# Altium PCB PCB.PcbDoc (part 2 of 2)
Units mm, origin at the board's own origin, x right, y up, seen from the top; angles counter-clockwise.
Board outline 143.9 x 84.61 mm, 2 copper layers (Top Layer, Bottom Layer); 156 components, 117 nets, 550 pads, 1112 vias.
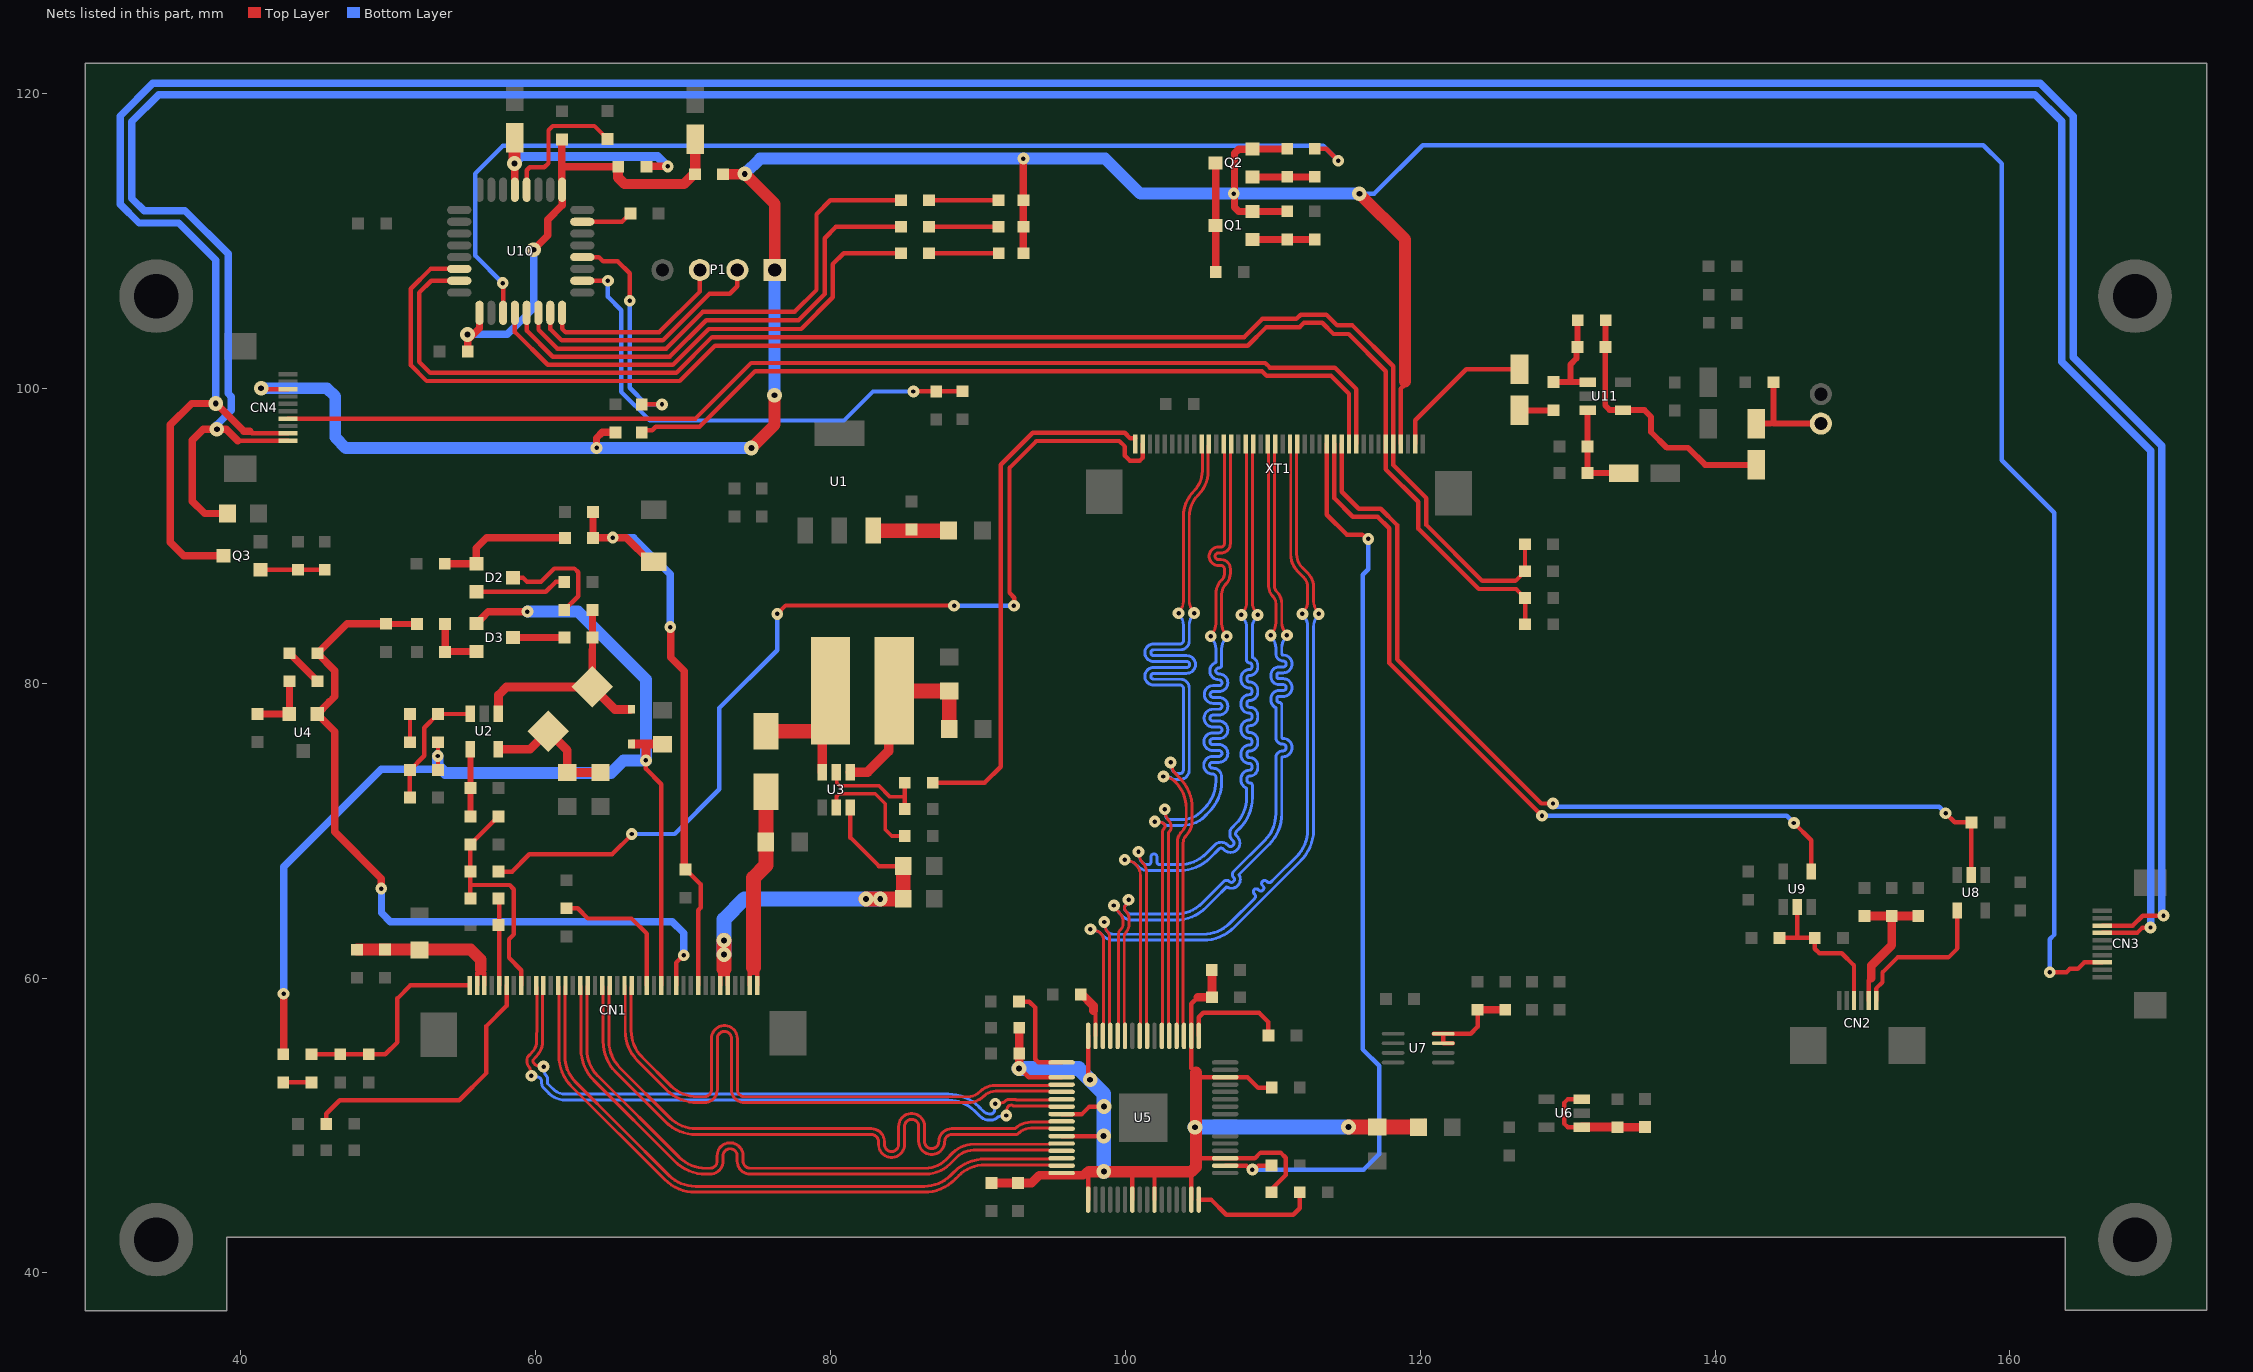
[diagram p2: the nets of this part, all layers, seen from the top]

## Via types
v1: diameter 0.8, hole 0.3, Top Layer to Bottom Layer, tented both sides, 1066 vias
v2: diameter 1, hole 0.4, Top Layer to Bottom Layer, tented both sides, 46 vias

## Nets (pads, with @x,y where several pads share a name; then routed paths per layer and width w, separated by ;. In a path a pad name is that pad's centre, name@x,y a point inside that pad or via, vN(x,y) a via of type N, cw(c..) or ccw(c..) an arc to the next point about the centre after c; other vN are vias at no path point) (continued)
LCD_AVDD: C10.1 C13.2 CN1.27 D1.2 D3.1 R7.2 R13.2 | length 81.5
  Top Layer w0.3: C10.1@53.375,74.105 R7.2@53.375,76 ; D3.1@55.975,84.05 56,84.05 56.3,84.35 D3.1@56.3,84.375 ; v1(67.48,74.76) 67.48,74.19 68.525,73.145 CN1.27@68.525,59.5 ; 67.48,75.822 67.533,75.875 ; C13.2@68.589,75.875 C13.2@68.604,75.86
  Top Layer w0.5: R13.2@42.875,54.83 42.9,54.855 v1(42.9,58.93) ; D3.1@56.3,84.375 56.785,84.86 v1(59.44,84.86)
  Top Layer w0.6: D1.2@66.58,75.875 67.533,75.875 C13.2@68.525,75.875 ; v1(67.48,74.76) 67.48,75.822
  Bottom Layer w0.5: v1(42.9,58.93) 42.9,67.54 49.52,74.16 53.61,74.16
  Bottom Layer w0.8: v1(53.36,75.06) 53.36,74.41 53.61,74.16 53.86,73.91 65.11,73.91 65.96,74.76 v1(67.48,74.76) 67.48,80.26 62.88,84.86 v1(59.44,84.86)
LCD_BKL_PWM0_30: R4.2 XT1.40 | length 35.7
  Top Layer w0.3: R4.2@86.94,73.25 90.45,73.25 91.54,74.34 91.54,94.81 93.72,96.99 99.95,96.99 100.32,96.62 XT1.40@100.67,96.62
LCD_EN_GPIO2_D4_30: R1.2 XT1.39 | length 68.3
  Top Layer w0.3: R1.2@57.475,67.225 58.405,67.225 59.57,68.39 65.18,68.39 v1@66.53,69.74 ; v1(76.38,84.7) 76.95,85.27 88.36,85.27 v1(88.38,85.25) ; v1@92.47,85.28 92.47,85.8 92.14,86.13 92.14,94.601 93.969,96.43 99.59,96.43 99.97,96.05 99.97,95.43 100.3,95.1 100.99,95.1 101.17,95.28 XT1.39@101.17,96.23
  Bottom Layer w0.3: v1(66.52,69.77) 69.43,69.77 72.46,72.8 72.46,78.32 76.38,82.24 v1(76.38,84.7) ; v1(88.38,85.25) v1(92.44,85.25) v1@92.47,85.28
LCD_RESET: C19.2 CN1.5 R3.1 | length 5.9
  Top Layer w0.3: R3.1@57.48,65.39 57.525,65.345 CN1.5@57.525,59.5
LCD_STBY: C18.2 CN1.8 R1.1 R2.2 R3.2 | length 16.4
  Top Layer w0.3: 55.57,66.31 R1.1@55.57,67.225 C18.2@55.57,69.065 57.22,70.715 57.225,70.715 R2.2@57.475,70.965 ; R3.2@55.575,65.39 55.57,65.395 55.57,66.28 55.6,66.31 58.24,66.31 58.52,66.03 58.52,62.96 58.19,62.63 58.19,61.37 59.025,60.535 CN1.8@59.025,59.5
LCD_VCOM: C15.2 CN1.1 R14.1 R15.2 | length 14.4
  Top Layer w0.3: R14.1@44.8,54.83 R15.2@46.75,54.83 48.67,54.83 C15.2@48.675,54.825 49.795,54.825 50.62,55.65 50.62,58.62 51.5,59.5 CN1.1@55.525,59.5
LCD_VDD: C20.2 C21.1 CN1.2 CN1.3 L6.2 | length 11.7
  Top Layer w0.3: CN1.2@56.025,59.5 56.025,60.345 56.28,60.6 56.525,60.355 CN1.3@56.525,59.5
  Top Layer w0.8: C20.2@47.875,61.93 47.97,61.93 C21.1@49.775,61.93 52.12,61.93 55.6,61.93 56.28,61.25 56.28,60.6
LCD_VGH: C17.2 CN1.29 R11.2 R17.2 U4.1 | length 52.8
  Top Layer w0.3: C17.2@49.84,84.03 C17.2@49.845,84.025 ; CN1.29@69.525,59.5 69.525,61.035 v1(70.04,61.55)
  Top Layer w0.4: C17.2@49.845,84.025 R11.2@51.95,84.025
  Top Layer w0.5: v1(49.53,66.07) 49.53,66.75 46.36,69.92 46.36,76.725 45.405,77.68 45.38,77.68 45.18,77.88 U4.1@45.18,77.905 46.005,78.73 46.01,78.73 46.38,79.1 46.38,80.855 R17.2@45.205,82.03 47.205,84.03 C17.2@49.84,84.03
  Bottom Layer w0.5: v1@49.54,66.07 49.54,64.43 50.14,63.83 69.27,63.83 70.04,63.06 v1(70.04,61.55)
LCD_VGL: C14.2 CN1.32 R10.2 R19.2 Z1.1 | length 40.3
  Top Layer w0.3: C14.2@70.22,67.41 70.34,67.29 70.34,67.21 71.2,66.35 71.2,64.78 71.025,64.605 CN1.32@71.025,59.5
  Top Layer w0.5: R19.2@63.885,91.62 R10.2@63.885,89.86 66.15,89.86 67.785,88.225 Z1.1@68.01,88.225 ; v1(69.13,83.81) 69.16,83.78 69.16,81.74 70.07,80.83 70.07,67.56 C14.2@70.22,67.41
  Bottom Layer w0.5: v1(65.23,89.88) 66.64,89.88 69.13,87.39 v1(69.13,83.81)
LED+: C16.2 CN1.39 CN1.40 D4.2 | length 14.9
  Top Layer w0.3: CN1.39@74.525,59.5 74.525,60.455 74.78,60.71 75.025,60.465 CN1.40@75.025,59.5
  Top Layer w1: 74.78,60.71 74.78,66.81 75.625,67.655 D4.2@75.625,72.64
LED-: CN1.35 CN1.36 R18.2 R20.2 U3.6 | length 29.2
  Top Layer w0.3: CN1.35@72.525,59.5 72.525,60.735 ; CN1.36@73.025,59.5 73.025,60.77 ; U3.6@81.35,71.565 81.35,69.53 83.285,67.595 R20.2@84.93,67.595
  Top Layer w1: 72.78,60.62 v2(72.78,61.59) v2(72.78,62.56) ; v2(82.4,65.37) v2(83.37,65.37) R18.2@84.93,65.37 R20.2@84.93,67.595
  Bottom Layer w1: v2(72.78,61.59) v2(72.78,62.56) 72.78,63.99 74.16,65.37 v2(82.4,65.37) v2(83.37,65.37)
LED_A: CN3.8 CN4.9 Q3.3 | length 240.6
  Top Layer w0.3: 40.61,97.08 40.74,96.95 CN4.9@43.2,96.95 ; CN3.8@166.26,63.56 168.34,63.56 169.01,64.23 170.41,64.23 v1(170.42,64.24)
  Top Layer w0.5: Q3.3@38.83,88.65 36.12,88.65 35.22,89.55 35.22,97.53 36.66,98.97 v2(38.3,98.97) 38.32,98.97 40.21,97.08 40.61,97.08
  Bottom Layer w0.5: v2@38.3,98.965 v2(38.3,98.97) 38.3,108.71 35.79,111.22 33.09,111.22 31.81,112.5 31.81,118.48 34.03,120.7 162.05,120.7 164.3,118.45 164.3,102.12 170.3,96.12 170.3,64.24 v1@170.3,64.23
LED_K: CN3.7 CN4.10 R49.2 | length 232.7
  Top Layer w0.3: 39.78,96.45 CN4.10@43.2,96.45 ; CN3.7@166.26,63.06 168.63,63.06 168.969,63.399 169.509,63.399 v1(169.54,63.43)
  Top Layer w0.5: R49.2@39.1,91.51 37.54,91.51 36.7,92.35 36.7,96.48 37.45,97.23 v2(38.37,97.23) 39,97.23 39.78,96.45
  Bottom Layer w0.5: v2@38.36,97.18 38.36,97.52 39.35,98.51 39.35,99.44 39.14,99.65 39.14,109.12 36.21,112.05 33.44,112.05 32.61,112.88 32.61,118.1 34.43,119.92 161.7,119.92 163.51,118.11 163.51,101.81 169.55,95.77 v1@169.55,63.48
LVDS_CH0_N: CN1.13 U5.47 | length 43.7
  Top Layer w0.2: CN1.13@61.525,59.5 cw(c61.404,59.379) 61.575,59.379 61.575,54.725 ccw(c64.511,54.725) 62.435,52.649 68.751,46.333 ccw(c70.823,48.406) 70.823,45.475 86.36,45.475 ccw(c86.36,48.407) 88.434,46.334 88.681,46.581 cw(c90.477,44.785) 90.477,47.325 94.813,47.325 cw(c94.813,47.24) 94.873,47.3 ccw(c94.933,47.36) 94.933,47.275 U5.47@95.675,47.275
LVDS_CH0_P: CN1.14 U5.46 | length 43.1
  Top Layer w0.2: CN1.14@62.025,59.5 ccw(c62.146,59.379) 61.975,59.379 61.975,54.727 ccw(c64.515,54.727) 62.719,52.931 65.718,49.932 ; 65.719,49.931 69.031,46.619 ccw(c70.827,48.415) 70.827,45.875 86.357,45.875 ccw(c86.357,48.415) 88.153,46.619 88.398,46.864 ; 88.4,46.866 cw(c90.474,44.792) 90.474,47.725 94.813,47.725 ccw(c94.813,47.81) 94.873,47.75 cw(c94.933,47.69) 94.933,47.775 U5.46@95.675,47.775
LVDS_CH1_N: CN1.16 U5.45 | length 43.7
  Top Layer w0.2: CN1.16@63.025,59.5 cw(c62.904,59.379) 63.075,59.379 63.075,55.15 ccw(c66.011,55.15) 63.935,53.074 69.449,47.56 ccw(c71.526,49.636) 71.526,46.7 71.826,46.7 ccw(c71.826,47.581) 72.707,47.581 72.707,47.943 cw(c73.188,47.943) 73.669,47.943 73.669,47.581 ccw(c74.55,47.581) 74.55,46.7 86.438,46.7 ccw(c86.438,49.06) 88.107,47.391 88.573,47.857 cw(c89.702,46.728) 89.702,48.325 94.813,48.325 cw(c94.813,48.24) 94.873,48.3 ccw(c94.933,48.36) 94.933,48.275 U5.45@95.675,48.275
LVDS_CH1_P: CN1.17 U5.44 | length 43.1
  Top Layer w0.2: CN1.17@63.525,59.5 ccw(c63.646,59.379) 63.475,59.379 63.475,55.152 ccw(c66.015,55.152) 64.219,53.356 69.731,47.844 ccw(c71.527,49.64) 71.527,47.1 71.826,47.1 ccw(c71.826,47.581) 72.307,47.581 72.307,47.943 cw(c73.188,47.943) 74.069,47.943 74.069,47.581 ccw(c74.55,47.581) 74.55,47.1 86.437,47.1 ccw(c86.437,49.063) 87.825,47.675 88.292,48.142 cw(c89.699,46.736) 89.699,48.725 94.813,48.725 ccw(c94.813,48.81) 94.873,48.75 cw(c94.933,48.69) 94.933,48.775 U5.44@95.675,48.775
LVDS_CH2_N: CN1.19 U5.42 | length 43.7
  Top Layer w0.2: CN1.19@64.525,59.5 cw(c64.404,59.379) 64.575,59.379 64.575,55.7 ccw(c67.511,55.7) 65.435,53.624 68.816,50.243 ccw(c70.893,52.319) 70.893,49.383 71.775,49.383 82.777,49.383 cw(c82.777,48.902) 83.258,48.902 83.258,48.714 ccw(c84.139,48.714) 85.02,48.714 85.02,49.936 cw(c85.501,49.936) 85.982,49.936 85.982,48.909 ccw(c86.863,48.909) 87.744,48.909 cw(c88.218,48.909) 88.218,49.383 92.519,49.383 ccw(c92.519,49.779) 92.799,49.499 92.8,49.5 cw(c93.585,48.715) 93.585,49.825 94.813,49.825 cw(c94.813,49.74) 94.873,49.8 ccw(c94.933,49.86) 94.933,49.775 U5.42@95.675,49.775
LVDS_CH2_P: CN1.20 U5.41 | length 43
  Top Layer w0.2: CN1.20@65.025,59.5 ccw(c65.146,59.379) 64.975,59.379 64.975,55.702 ccw(c67.515,55.702) 65.719,53.906 69.098,50.527 ccw(c70.894,52.323) 70.894,49.783 71.95,49.783 82.777,49.783 cw(c82.777,48.902) 83.658,48.902 83.658,48.714 ccw(c84.139,48.714) 84.62,48.714 84.62,49.936 cw(c85.501,49.936) 86.382,49.936 86.382,48.909 ccw(c86.863,48.909) 87.344,48.909 cw(c88.218,48.909) 88.218,49.783 92.517,49.783 92.519,49.785 cw(c93.582,48.722) 93.582,50.225 94.813,50.225 ccw(c94.813,50.31) 94.873,50.25 cw(c94.933,50.19) 94.933,50.275 U5.41@95.675,50.275
LVDS_CH3_N: CN1.22 U5.37 | length 43.9
  Top Layer w0.2: CN1.22@66.025,59.5 cw(c65.904,59.379) 66.075,59.379 66.075,56.435 ccw(c69.011,56.435) 66.935,54.359 ; 66.936,54.358 68.884,52.41 ccw(c70.961,54.486) 70.961,51.55 71.44,51.55 ccw(c71.44,52.431) 72.321,52.431 72.321,55.898 cw(c72.802,55.898) 73.283,55.898 73.283,52.431 ccw(c74.164,52.431) 74.164,51.55 89.308,51.55 ccw(c89.308,53.138) 90.431,52.015 90.433,52.017 cw(c91.176,51.274) 91.176,52.325 94.813,52.325 cw(c94.813,52.24) 94.873,52.3 ccw(c94.933,52.36) 94.933,52.275 U5.37@95.675,52.275
LVDS_CH3_P: CN1.23 U5.36 | length 43.2
  Top Layer w0.2: CN1.23@66.525,59.5 ccw(c66.646,59.379) 66.475,59.379 66.475,56.437 ccw(c69.015,56.437) 67.219,54.641 69.166,52.694 ccw(c70.962,54.49) 70.962,51.95 71.44,51.95 ccw(c71.44,52.431) 71.921,52.431 71.921,55.898 cw(c72.802,55.898) 73.683,55.898 73.683,52.431 ccw(c74.164,52.431) 74.164,51.95 89.305,51.95 ccw(c89.305,53.145) 90.15,52.3 90.152,52.302 cw(c91.173,51.28) 91.173,52.725 94.813,52.725 ccw(c94.813,52.81) 94.873,52.75 cw(c94.933,52.69) 94.933,52.775 U5.36@95.675,52.775
LVDS_CLK_N: CN1.10 U5.39 | length 43.3
  Top Layer w0.2: v1@59.636,53.761 ccw(c59.335,53.761) 59.548,53.974 cw(c59.881,54.307) 59.41,54.307 59.41,54.451 cw(c59.808,54.451) 59.527,54.732 59.742,54.947 ccw(c58.949,55.74) 60.07,55.74 60.07,56.286 cw(c60.468,56.286) 60.075,56.349 CN1.10@60.075,59.379 ; 91.974,51.104 cw(c92.245,51.104) 92.053,51.296 92.057,51.3 cw(c92.239,51.118) 92.239,51.375 92.311,51.375 cw(c92.311,51.29) 92.371,51.35 ccw(c92.431,51.41) 92.431,51.325 94.813,51.325 cw(c94.813,51.24) 94.873,51.3 ccw(c94.933,51.36) 94.933,51.275 U5.39@95.675,51.275
  Bottom Layer w0.2: v1(59.71,53.37) ccw(c59.888,53.548) 59.888,53.296 60.096,53.296 cw(c60.096,52.982) 60.318,53.204 cw(c60.096,52.982) 60.41,52.982 60.41,52.835 ccw(c60.808,52.835) 60.527,52.553 60.885,52.195 ccw(c62.02,53.329) 62.02,51.725 87.984,51.725 cw(c87.984,49.185) 89.78,50.981 90.137,50.625 ccw(c90.74,51.229) 90.74,50.375 90.955,50.375 ccw(c90.955,50.804) 91.258,50.501 cw(c91.562,50.197) 91.562,50.626 91.807,50.626 ccw(c91.807,50.793) v1(91.925,50.675)
LVDS_CLK_P: CN1.11 U5.38 | length 42.8
  Top Layer w0.2: 60.132,54.069 cw(c60.132,54.341) 59.939,54.149 59.932,54.156 cw(c60.226,54.45) 59.81,54.45 60.025,54.665 ccw(c58.951,55.739) 60.47,55.739 ; 60.475,55.739 60.475,59.379 cw(c60.646,59.379) CN1.11@60.525,59.5 ; v1@91.538,51.524 ccw(c91.538,51.953) 91.842,51.649 cw(c92.145,51.346) 92.145,51.775 92.511,51.775 cw(c92.511,51.69) 92.571,51.75 ccw(c92.631,51.81) 92.631,51.725 94.813,51.725 ccw(c94.813,51.81) 94.873,51.75 cw(c94.933,51.69) 94.933,51.775 U5.38@95.675,51.775
  Bottom Layer w0.2: v1(60.535,53.995) cw(c60.357,53.817) 60.609,53.817 60.609,53.621 ccw(c60.952,53.621) 60.709,53.378 cw(c60.467,53.136) 60.81,53.136 60.81,52.868 ccw(c60.888,52.868) 60.833,52.813 61.166,52.48 ccw(c62.022,53.336) 62.022,52.125 87.986,52.125 cw(c87.986,49.188) 90.062,51.265 90.338,50.989 ccw(c90.855,51.505) 90.855,50.775 ccw(c90.855,51.046) 91.047,50.854 ccw(c90.855,51.046) 91.126,51.046 91.126,51.357 cw(c91.293,51.357) v1(91.175,51.475)
MCU_IRQ_33: R54.2 XT1.11 | length 53.7
  Top Layer w0.3: R54.2@67.2,97.15 67.9,97.15 68.15,97.4 71.11,97.4 74.88,101.17 109.27,101.17 109.58,100.86 111.83,100.86 113.95,100.86 115.17,99.64 XT1.11@115.17,96.23
MCU_VDD: C42.1 C44.1 C46.1 L10.2 L11.1 U10.1 U10.17 | length 33
  Top Layer w0.3: U10.1@61.78,113.485 U10.1@61.79,113.475
  Top Layer w0.5: C42.1@55.39,102.5 55.39,103.29 56.19,104.09 U10.17@56.19,105.125 ; v2(59.85,109.4) 60.82,110.37 60.82,111.45 61.79,112.42 U10.1@61.79,113.475 ; U10.1@61.78,113.485 61.78,115.03 ; C44.1@61.78,116.89 61.78,115.03 ; L10.2@65.58,114.85 65.4,115.03 61.78,115.03 ; C46.1@70.82,116.89 C46.1@70.82,117.07
  Top Layer w0.7: L10.2@65.58,114.85 65.58,114.31 66.03,113.86 70.04,113.86 70.82,114.64 C46.1@70.82,116.89
  Bottom Layer w0.5: v2(55.38,103.66) 58.08,103.66 59.87,105.45 v2@59.87,109.42
MIC_OUT: C52.2 XT1.2 | length 10.1
  Top Layer w0.3: XT1.2@119.67,96.23 119.67,97.84 123.13,101.3 C52.2@126.74,101.3
MIPI_1V8: C22.1 C23.2 C24.1 C25.2 C26.1 C27.2 C28.2 C30.2 L7.1 R28.2 U5.3 U5.14 U5.18 U5.32 U5.35 U5.40 U5.43 U5.48 U5.49 U5.55 U5.58 U5.63 | length 93.5
  Top Layer w0.3: v2@92.8,53.93 93.455,53.275 U5.35@95.675,53.275 ; U5.43@95.675,49.275 98.515,49.275 v2(98.53,49.29) ; U5.40@95.675,50.775 97.055,50.775 97.56,51.28 v2@98.56,51.28 ; 97.37,46.85 97.4,46.85 97.475,46.925 U5.49@97.475,44.975 ; U5.32@97.475,56.075 97.475,53.235 v2(97.61,53.1) ; U5.55@100.475,44.975 100.475,46.865 ; U5.58@101.975,44.975 101.975,46.865 ; U5.63@104.475,44.975 104.475,46.865 ; 104.8,47.775 U5.3@106.775,47.775 107.732,47.775 107.737,47.78 108.79,47.78 109.17,48.16 110.53,48.16 110.88,47.81 110.88,46.64 109.92,45.68 R28.2@109.92,45.475 ; 104.92,58.7 104.475,58.255 U5.18@104.475,56.075 104.475,53.895 104.785,53.585 105.095,53.275 U5.14@106.775,53.275 108.285,53.275 109,52.56 C28.2@109.87,52.56 ; 105.875,59.63 105.915,59.67 ; L7.1@119.87,49.89 L7.1@119.88,49.88 119.88,49.91 L7.1@120.3,50.33
  Top Layer w0.6: C27.2@90.925,46.105 C26.1@92.725,46.105 93.645,46.105 94.165,46.625 97.145,46.625 97.37,46.85 ; v2@92.8,53.93 C25.2@92.8,54.875 C24.1@92.8,56.625 ; 104.92,58.7 C23.2@105.875,58.7 105.875,59.63 C22.1@105.875,60.5
  Top Layer w0.8: 97.535,46.865 100.475,46.865 101.975,46.865 104.475,46.865 104.785,47.175 104.785,53.585
  Top Layer w1: v2(115.13,49.89) C30.2@117.08,49.89 L7.1@119.87,49.89
  Bottom Layer w1: v2(92.79,53.86) 96.83,53.86 98.54,52.15 v2(98.54,46.87) ; v2(104.73,49.88) 104.73,49.89 v2(115.13,49.89)
  other v2: 98.55,51.28
MIPI_EN_18: R29.2 U5.2 XT1.14 | length 63
  Top Layer w0.3: U5.2@106.775,47.275 108.22,47.275 108.485,47.01 v1(108.62,47.01) 108.755,47.01 109.025,47.28 R29.2@109.92,47.28 ; XT1.14@113.67,96.23 113.67,91.42 115.01,90.08 116.06,90.08 116.35,89.79 v1(116.48,89.79)
  Bottom Layer w0.3: v1(108.62,47.01) 116.17,47.01 117.22,48.06 117.22,54.05 116.11,55.16 116.11,87.36 116.48,87.73 v1(116.48,89.79)
MIPI_IRQ_18: R30.2 U5.33 | length 6.7
  Top Layer w0.3: R30.2@92.78,58.4 93.48,58.4 93.88,58 93.88,54.5 94.105,54.275 U5.33@95.675,54.275
MIPI_TX_CLK_N: U5.25 XT1.24 | length 53.3
  Top Layer w0.2: v1(99.96,68.02) ccw(c100.143,68.203) 100.143,67.944 cw(c100.143,67.144) 100.709,67.71 cw(c99.945,66.946) 101.025,66.946 101.025,56.937 cw(c100.94,56.937) 101,56.877 ccw(c101.06,56.817) 100.975,56.817 U5.25@100.975,56.075 ; XT1.24@108.67,96.23 ccw(c108.791,96.109) 108.62,96.109 108.62,85.475 ccw(c109.653,85.475) 108.923,84.745 cw(c108.808,84.63) v1(108.97,84.63)
  Bottom Layer w0.2: v1(99.96,68.02) ccw(c100.143,68.203) 100.143,67.944 cw(c100.143,67.144) 100.709,67.71 100.838,67.581 ccw(c101.54,68.283) 101.54,67.29 102.34,67.29 102.54,67.29 103.671,67.29 ccw(c103.671,70.222) 105.745,68.149 106.34,68.744 cw(c106.501,68.584) 106.661,68.744 106.697,68.709 ccw(c107.14,69.152) 107.584,68.709 ccw(c107.14,69.152) 107.767,69.152 ccw(c107.14,69.152) 107.584,69.595 107.548,69.631 ; 107.548,69.631 cw(c107.708,69.792) 107.548,69.952 107.761,70.165 ccw(c105.687,72.239) 108.62,72.239 108.62,73.043 ccw(c108.42,73.043) 108.42,73.243 cw(c108.42,73.413) 108.25,73.413 108.25,73.527 cw(c108.42,73.527) 108.42,73.697 ccw(c108.42,74.257) 108.98,74.257 108.98,74.391 ccw(c108.42,74.391) 108.42,74.951 cw(c108.42,75.121) 108.25,75.121 108.25,75.235 cw(c108.42,75.235) 108.42,75.405 ccw(c108.42,75.965) 108.98,75.965 108.98,76.099 ccw(c108.42,76.099) 108.42,76.659 cw(c108.42,76.829) 108.25,76.829 108.25,76.943 cw(c108.42,76.943) 108.42,77.113 ccw(c108.42,77.673) 108.98,77.673 108.98,77.807 ccw(c108.42,77.807) 108.42,78.367 cw(c108.42,78.537) 108.25,78.537 108.25,78.651 cw(c108.42,78.651) 108.42,78.821 ccw(c108.42,79.381) 108.98,79.381 108.98,79.515 ccw(c108.42,79.515) 108.42,80.075 cw(c108.42,80.245) 108.25,80.245 108.25,80.359 cw(c108.42,80.359) 108.42,80.529 ccw(c108.42,81.089) 108.98,81.089 108.98,81.223 ccw(c108.42,81.223) 108.62,81.746 108.62,83.785 cw(c109.653,83.785) 108.923,84.515 ccw(c108.808,84.63) v1(108.97,84.63)
MIPI_TX_CLK_P: U5.24 XT1.25 | length 53.3
  Top Layer w0.2: v1(100.89,68.57) cw(c100.752,68.432) 100.947,68.432 100.947,68.375 ccw(c101.763,68.375) 101.186,67.798 cw(c100.609,67.221) 101.425,67.221 101.425,56.937 ccw(c101.51,56.937) 101.45,56.877 cw(c101.39,56.817) 101.475,56.817 U5.24@101.475,56.075 ; v1(107.87,84.63) cw(c108.032,84.63) 107.917,84.745 ccw(c107.187,85.475) 108.22,85.475 108.22,96.109 ccw(c108.049,96.109) XT1.25@108.17,96.23
  Bottom Layer w0.2: v1(100.89,68.57) cw(c100.752,68.432) 100.947,68.432 100.947,68.283 ccw(c101.54,68.283) 101.121,67.864 ccw(c101.54,68.283) 101.54,67.69 ccw(c101.54,67.89) 101.74,67.89 101.74,68.221 cw(c101.94,68.221) 101.94,68.421 cw(c101.94,68.221) 102.14,68.221 102.14,67.89 ccw(c102.34,67.89) 102.34,67.69 102.54,67.69 103.33,67.69 103.668,67.69 ccw(c103.668,70.23) 105.464,68.434 106.057,69.027 cw(c106.501,68.584) 106.944,69.027 106.98,68.992 ccw(c107.14,69.152) 107.301,68.992 ccw(c107.14,69.152) 107.367,69.152 ccw(c107.14,69.152) 107.301,69.313 107.265,69.348 cw(c107.708,69.792) 107.265,70.235 107.476,70.446 ccw(c105.68,72.242) 108.22,72.242 108.22,72.879 cw(c108.42,73.413) 107.85,73.413 107.85,73.527 cw(c108.42,73.527) 108.42,74.097 ccw(c108.42,74.257) 108.58,74.257 108.58,74.391 ccw(c108.42,74.391) 108.42,74.551 cw(c108.42,75.121) 107.85,75.121 107.85,75.235 cw(c108.42,75.235) 108.42,75.805 ccw(c108.42,75.965) 108.58,75.965 108.58,76.099 ccw(c108.42,76.099) 108.42,76.259 cw(c108.42,76.829) 107.85,76.829 107.85,76.943 cw(c108.42,76.943) 108.42,77.513 ccw(c108.42,77.673) 108.58,77.673 108.58,77.807 ccw(c108.42,77.807) 108.42,77.967 cw(c108.42,78.537) 107.85,78.537 107.85,78.651 cw(c108.42,78.651) 108.42,79.221 ccw(c108.42,79.381) 108.58,79.381 108.58,79.515 ccw(c108.42,79.515) 108.42,79.675 cw(c108.42,80.245) 107.85,80.245 107.85,80.359 cw(c108.42,80.359) 108.42,80.929 ccw(c108.42,81.089) 108.58,81.089 108.58,81.223 ccw(c108.42,81.223) 108.42,81.383 cw(c108.42,81.583) 108.22,81.583 108.22,83.785 ccw(c107.187,83.785) 107.917,84.515 cw(c108.032,84.63) v1(107.87,84.63)
MIPI_TX_D0_N: U5.20 XT1.30 | length 53.3
  Top Layer w0.2: v1(102.58,73.67) ccw(c102.748,73.838) 102.748,73.6 cw(c102.748,72.75) 103.35,73.351 103.386,73.315 cw(c101.59,71.519) 104.13,71.519 104.13,70.86 104.13,70.65 cw(c103.14,70.65) 103.84,69.95 103.839,69.949 ccw(c104.596,69.191) 103.525,69.191 103.525,56.937 cw(c103.44,56.937) 103.5,56.877 ccw(c103.56,56.817) 103.475,56.817 U5.20@103.475,56.075 ; v1(104.66,84.76) ccw(c104.438,84.76) 104.595,84.917 cw(c105.222,85.545) 104.335,85.545 104.335,86.42 104.335,91.3 cw(c106.41,91.3) 104.943,92.767 104.946,92.771 ccw(c103.32,94.397) 105.62,94.397 105.62,96.109 cw(c105.791,96.109) XT1.30@105.67,96.23
  Bottom Layer w0.2: v1(102.58,73.67) ccw(c102.748,73.838) 102.748,73.6 103.01,73.6 cw(c103.01,73.382) 103.164,73.537 ccw(c103.319,73.691) 103.319,73.473 103.713,73.473 ccw(c103.713,74.074) 104.139,73.649 104.141,73.651 ccw(c103.673,74.119) 104.335,74.119 104.335,79.67 ccw(c103.735,79.67) 103.735,80.27 101.924,80.27 cw(c101.924,80.47) 101.924,80.67 104.158,80.67 ccw(c104.158,81.27) 104.758,81.27 ccw(c104.158,81.27) 104.158,81.87 101.924,81.87 cw(c101.924,82.07) 101.924,82.27 103.735,82.27 ccw(c103.735,82.87) 104.335,82.87 104.335,83.975 cw(c105.222,83.975) 104.595,84.603 ccw(c104.438,84.76) v1(104.66,84.76)
MIPI_TX_D0_P: U5.19 XT1.31 | length 53.5
  Top Layer w0.2: v1(103.61,84.75) cw(c103.832,84.75) 103.675,84.907 ccw(c103.048,85.535) 103.935,85.535 103.935,86.423 103.935,91.305 cw(c106.398,91.305) 104.656,93.046 104.66,93.05 ccw(c103.308,94.402) 105.22,94.402 105.22,96.109 ccw(c105.049,96.109) XT1.31@105.17,96.23 ; U5.19@103.975,56.075 103.975,56.817 ccw(c103.89,56.817) 103.95,56.877 cw(c104.01,56.937) 103.925,56.937 103.925,69.19 cw(c104.6,69.19) 104.123,69.667 104.125,69.669 ccw(c103.146,70.647) 104.53,70.647 104.53,71.523 ccw(c101.601,71.523) 103.672,73.594 103.377,73.89 cw(c103.928,74.441) v1@103.148,74.441 ; v1@103.148,74.441 ccw(c102.881,74.441) v1(103.07,74.63) cw(c102.881,74.441) v1@103.148,74.441
  Bottom Layer w0.2: v1(103.07,74.63) cw(c102.881,74.441) 103.148,74.441 103.148,74.292 ccw(c103.568,74.292) 103.271,73.995 ccw(c103.568,74.292) 103.568,73.873 103.712,73.873 ccw(c103.712,74.078) 103.857,73.933 ccw(c103.669,74.121) 103.935,74.121 103.935,79.67 ccw(c103.735,79.67) 103.735,79.87 101.924,79.87 cw(c101.924,80.47) 101.924,81.07 104.158,81.07 ccw(c104.158,81.27) 104.358,81.27 ccw(c104.158,81.27) 104.158,81.47 101.924,81.47 cw(c101.924,82.07) 101.924,82.67 103.735,82.67 ccw(c103.735,82.87) 103.935,82.87 103.935,83.965 ccw(c103.048,83.965) 103.675,84.593 cw(c103.832,84.75) v1(103.61,84.75)
MIPI_TX_D1_N: U5.22 XT1.27 | length 52.9
  Top Layer w0.2: 102.406,70.554 cw(c102.406,70.269) 102.607,70.47 102.631,70.446 cw(c102.49,70.304) 102.69,70.304 cw(c102.49,70.304) 102.631,70.163 ccw(c102.888,69.906) 102.525,69.906 102.525,56.937 cw(c102.44,56.937) 102.5,56.877 ccw(c102.56,56.817) 102.475,56.817 U5.22@102.475,56.075 ; v1(106.88,83.19) ccw(c106.706,83.19) 106.829,83.313 cw(c107.539,84.023) 106.535,84.023 106.535,85.91 106.535,86.046 cw(c107.474,86.046) 106.81,86.71 106.812,86.712 ccw(c106.068,87.456) 107.12,87.456 107.12,87.757 ccw(c106.493,87.757) 106.493,88.384 106.311,88.384 cw(c106.311,88.611) 106.311,88.838 106.493,88.838 ccw(c106.493,89.465) 107.12,89.465 107.12,96.109 cw(c107.291,96.109) XT1.27@107.17,96.23
  Bottom Layer w0.2: v1(101.99,70.61) ccw(c102.126,70.746) 102.126,70.554 102.38,70.554 cw(c102.38,70.206) 102.625,70.452 ccw(c102.871,70.698) 102.871,70.35 103.88,70.35 ccw(c103.88,72.488) 105.392,70.976 105.676,71.26 ccw(c103.602,73.334) 106.535,73.334 106.535,73.636 ccw(c105.935,73.636) 105.935,74.236 ; 105.915,74.236 cw(c105.915,74.436) 105.915,74.636 106.35,74.636 ccw(c106.35,75.236) 106.95,75.236 ccw(c106.35,75.236) 106.35,75.836 105.927,75.836 cw(c105.927,76.036) 105.927,76.236 106.35,76.236 ccw(c106.35,76.836) 106.95,76.836 ccw(c106.35,76.836) 106.35,77.436 105.939,77.436 cw(c105.939,77.636) 105.939,77.836 106.35,77.836 ccw(c106.35,78.436) 106.95,78.436 ccw(c106.35,78.436) 106.35,79.036 105.952,79.036 cw(c105.952,79.236) 105.952,79.436 106.35,79.436 ccw(c106.35,80.036) 106.95,80.036 ccw(c106.35,80.036) 106.35,80.636 ; 106.329,80.636 cw(c106.329,80.836) 106.329,81.036 ccw(c106.335,81.236) 106.535,81.236 106.535,82.357 cw(c107.539,82.357) 106.829,83.067 ccw(c106.706,83.19) v1(106.88,83.19)
MIPI_TX_D1_P: U5.21 XT1.28 | length 52.5
  Top Layer w0.2: v1@102.726,71.174 ccw(c103.347,71.174) 102.908,70.735 102.915,70.728 cw(c102.493,70.306) 103.09,70.306 103.09,70.172 cw(c102.808,70.172) 103.008,69.973 ccw(c103.207,69.774) 102.925,69.774 102.925,56.937 ccw(c103.01,56.937) 102.95,56.877 cw(c102.89,56.817) 102.975,56.817 U5.21@102.975,56.075 ; v1(105.79,83.19) cw(c105.964,83.19) 105.841,83.313 ccw(c105.131,84.023) 106.135,84.023 106.135,86.049 cw(c107.468,86.049) 106.525,86.991 106.527,86.993 ccw(c106.062,87.458) 106.72,87.458 106.72,87.757 ccw(c106.493,87.757) 106.493,87.984 106.311,87.984 cw(c106.311,88.611) 106.311,89.238 106.493,89.238 ccw(c106.493,89.465) 106.72,89.465 106.72,96.109 ccw(c106.549,96.109) XT1.28@106.67,96.23
  Bottom Layer w0.2: v1(102.67,71.45) cw(c102.534,71.314) 102.726,71.314 102.726,71.034 ccw(c103.011,71.034) 102.81,70.833 ccw(c103.011,71.034) 103.011,70.75 103.879,70.75 ccw(c103.879,72.491) 105.11,71.26 105.391,71.541 ccw(c103.595,73.337) 106.135,73.337 106.135,73.636 ccw(c105.935,73.636) 105.935,73.836 ; v1(105.79,83.19) ccw(c105.964,83.19) 105.841,83.067 cw(c105.131,82.357) 106.135,82.357 106.135,81.403 ccw(c106.329,80.836) 106.329,80.236 ; 105.915,73.836 cw(c105.915,74.436) 105.915,75.036 106.35,75.036 ccw(c106.35,75.236) 106.55,75.236 ccw(c106.35,75.236) 106.35,75.436 105.927,75.436 cw(c105.927,76.036) 105.927,76.636 106.35,76.636 ccw(c106.35,76.836) 106.55,76.836 ccw(c106.35,76.836) 106.35,77.036 105.939,77.036 cw(c105.939,77.636) 105.939,78.236 106.35,78.236 ccw(c106.35,78.436) 106.55,78.436 ccw(c106.35,78.436) 106.35,78.636 105.952,78.636 cw(c105.952,79.236) 105.952,79.836 106.35,79.836 ccw(c106.35,80.036) 106.55,80.036 ccw(c106.35,80.036) 106.35,80.236
MIPI_TX_D2_N: U5.28 XT1.21 | length 53.8
  Top Layer w0.2: v1(99.22,64.92) ccw(c99.424,64.92) 99.28,64.776 99.716,64.269 cw(c99.157,63.86) 99.85,63.86 99.85,63.69 cw(c99.27,63.69) 99.68,63.28 ccw(c100.054,62.906) 99.525,62.906 99.525,56.937 cw(c99.44,56.937) 99.5,56.877 ccw(c99.56,56.817) 99.475,56.817 U5.28@99.475,56.075 ; XT1.21@110.17,96.23 ccw(c110.291,96.109) 110.12,96.109 110.12,86.576 ccw(c110.676,86.576) 110.283,86.183 110.284,86.182 cw(c109.496,85.394) 110.61,85.394 110.61,84.105 ccw(c111.643,84.105) 110.913,83.375 cw(c110.798,83.26) v1(110.96,83.26)
  Bottom Layer w0.2: v1(99.22,64.92) ccw(c99.424,64.92) 99.28,64.776 99.532,64.524 cw(c99.482,64.474) 99.553,64.474 ccw(c99.623,64.474) 99.573,64.424 99.798,64.199 ccw(c100.448,64.85) 99.799,64.198 ccw(c100.448,64.85) 100.448,63.93 103.401,63.93 ccw(c103.401,66.862) 105.475,64.789 106.08,65.394 106.873,66.187 ccw(c107.198,66.691) 107.798,66.691 ccw(c107.198,66.691) 107.702,67.016 109.751,69.065 ccw(c107.677,71.139) 110.61,71.139 110.61,74.936 cw(c110.683,74.936) 110.683,75.009 ccw(c110.683,75.636) 111.31,75.636 ccw(c110.683,75.636) 110.683,76.263 cw(c110.683,76.336) 110.61,76.336 110.61,78.505 ccw(c110.41,78.505) 110.41,78.705 cw(c110.41,78.835) 110.28,78.835 110.28,78.975 cw(c110.41,78.975) 110.41,79.105 110.71,79.105 ccw(c110.71,79.705) 111.31,79.705 ccw(c110.71,79.705) 110.71,80.305 110.41,80.305 cw(c110.41,80.435) 110.28,80.435 110.28,80.575 cw(c110.41,80.575) 110.41,80.705 110.71,80.705 ccw(c110.71,81.305) 111.31,81.305 ccw(c110.71,81.305) 110.71,81.905 cw(c110.71,82.005) 110.61,82.005 110.61,82.415 cw(c111.643,82.415) 110.913,83.145 ccw(c110.798,83.26) v1(110.96,83.26)
MIPI_TX_D2_P: U5.27 XT1.22 | length 53.3
  Top Layer w0.2: U5.27@99.975,56.075 99.975,56.817 ccw(c99.89,56.817) 99.95,56.877 cw(c100.01,56.937) 99.925,56.937 99.925,62.903 cw(c100.062,62.903) 99.965,62.999 ; 99.982,62.982 99.965,62.999 ; v1(100.22,65.31) cw(c99.858,65.31) 100.114,65.054 100.053,64.993 ccw(c100.294,64.751) 99.953,64.751 ccw(c100.294,64.751) 100.053,64.51 cw(c99.576,64.033) 100.25,64.033 100.25,63.687 cw(c99.277,63.687) 99.965,62.999 ; XT1.22@109.67,96.23 cw(c109.549,96.109) 109.72,96.109 109.72,86.575 ccw(c110.674,86.575) 109.999,85.901 cw(c109.493,85.393) 110.21,85.393 110.21,84.085 cw(c109.177,84.085) 109.907,83.355 ccw(c110.022,83.24) v1(109.86,83.24)
  Bottom Layer w0.2: v1(100.22,65.31) cw(c99.858,65.31) 100.114,65.054 100.053,64.993 ccw(c100.294,64.751) 99.953,64.751 99.953,64.693 ccw(c100.153,64.693) 100.011,64.551 100.079,64.483 ccw(c100.45,64.855) 100.45,64.33 103.398,64.33 ccw(c103.398,66.87) 105.194,65.074 105.674,65.554 106.669,66.549 cw(c106.863,66.356) 107.057,66.549 ccw(c107.198,66.691) 107.339,66.549 ccw(c107.198,66.691) 107.398,66.691 ccw(c107.198,66.691) 107.34,66.832 cw(c107.533,67.026) 107.34,67.22 109.466,69.346 ccw(c107.67,71.142) 110.21,71.142 110.21,74.936 cw(c110.683,74.936) 110.683,75.409 ccw(c110.683,75.636) 110.91,75.636 ccw(c110.683,75.636) 110.683,75.863 cw(c110.683,76.336) 110.21,76.336 110.21,78.344 cw(c110.41,78.835) 109.88,78.835 109.88,78.975 cw(c110.41,78.975) 110.41,79.505 110.71,79.505 ccw(c110.71,79.705) 110.91,79.705 ccw(c110.71,79.705) 110.71,79.905 110.41,79.905 cw(c110.41,80.435) 109.88,80.435 109.88,80.575 cw(c110.41,80.575) 110.41,81.105 110.71,81.105 ccw(c110.71,81.305) 110.91,81.305 ccw(c110.71,81.305) 110.71,81.505 cw(c110.71,82.005) 110.21,82.005 110.21,82.395 ccw(c109.177,82.395) 109.907,83.125 cw(c110.022,83.24) v1(109.86,83.24)
MIPI_TX_D3_N: U5.30 XT1.18 | length 53.5
  Top Layer w0.2: v1(97.63,63.31) ccw(c97.829,63.509) 97.829,63.228 97.864,63.228 cw(c97.864,62.566) 98.331,63.034 cw(c97.864,62.566) 98.525,62.566 98.525,56.937 cw(c98.44,56.937) 98.5,56.877 ccw(c98.56,56.817) 98.475,56.817 U5.30@98.475,56.075 ; XT1.18@111.67,96.23 ccw(c111.791,96.109) 111.62,96.109 111.62,88.74 ccw(c112.862,88.74) 111.984,87.862 112.374,87.472 cw(c111.429,86.527) 112.765,86.527 112.765,85.557 ccw(c113.827,85.557) 113.076,84.806 cw(c112.97,84.7) v1(113.12,84.7)
  Bottom Layer w0.2: v1(97.63,63.31) ccw(c97.829,63.509) 97.829,63.228 cw(c97.829,62.482) 98.356,63.009 98.522,62.843 ccw(c99.182,63.503) 99.182,62.57 105.291,62.57 ccw(c105.291,65.502) 107.365,63.429 111.906,67.97 ccw(c109.832,70.044) 112.765,70.044 112.765,74.824 112.765,75.09 112.765,83.843 cw(c113.827,83.843) 113.076,84.594 ccw(c112.97,84.7) v1(113.12,84.7)
MIPI_TX_D3_P: U5.29 XT1.19 | length 53
  Top Layer w0.2: v1@98.645,63.483 ccw(c99.123,63.483) 98.785,63.146 cw(c98.448,62.808) 98.925,62.808 98.925,56.937 ccw(c99.01,56.937) 98.95,56.877 cw(c98.89,56.817) 98.975,56.817 U5.29@98.975,56.075 ; XT1.19@111.17,96.23 cw(c111.049,96.109) 111.22,96.109 111.22,88.738 ccw(c112.856,88.738) 111.699,87.581 112.09,87.19 cw(c111.426,86.526) 112.365,86.526 112.365,85.557 cw(c111.303,85.557) 112.054,84.806 ccw(c112.16,84.7) v1(112.01,84.7)
  Bottom Layer w0.2: v1(98.57,63.8) cw(c98.388,63.618) 98.645,63.618 98.645,63.509 ccw(c99.184,63.509) 98.803,63.128 ccw(c99.184,63.509) 99.184,62.97 105.288,62.97 ccw(c105.288,65.51) 107.084,63.714 108.77,65.4 ccw(c108.629,65.541) 108.77,65.683 108.739,65.714 cw(c108.88,65.855) 108.739,65.997 cw(c108.88,65.855) 109.022,65.997 109.053,65.966 ccw(c109.194,66.107) 109.336,65.966 ccw(c109.194,66.107) 109.336,66.249 109.305,66.28 cw(c109.446,66.421) 109.305,66.563 cw(c109.446,66.421) 109.587,66.563 109.619,66.531 ccw(c109.76,66.673) 109.901,66.531 110.09,66.72 111.621,68.251 ccw(c109.825,70.047) 112.365,70.047 112.365,74.824 112.365,75.09 112.365,83.843 ccw(c111.303,83.843) 112.054,84.594 cw(c112.16,84.7) v1(112.01,84.7)
NetC1_1: C1.1 L1.1 U1.3 | length 5.1
  Top Layer w0.3: L1.1@87.925,90.35 L1.1@88,90.425
  Top Layer w1: U1.3@82.9,90.35 L1.1@87.925,90.35
NetC2_2: C2.2 L2.1 L3.1 U2.5 | length 9.5
  Top Layer w0.6: U2.5@57.475,75.525 59.613,75.525 L3.1@60.838,76.75 62.14,75.448 C2.2@62.14,73.94 L2.1@64.4,73.94
NetC3_2: C3.2 R2.1 U2.4 | length 4.6
  Top Layer w0.3: C3.2@55.57,72.895 C3.2@55.575,72.9
  Top Layer w0.4: R2.1@55.57,70.965 C3.2@55.57,72.895 ; C3.2@55.575,72.9 U2.4@55.575,75.525
NetC6_1: C6.1 D2.3 | length 7.9
  Top Layer w0.3: D2.3@58.475,87.15 59.14,87.15 59.41,86.88 60.36,86.88 61.26,87.78 62.63,87.78 62.88,87.53 62.88,85.905 C6.1@61.945,84.97
NetC6_2: C6.2 C7.2 D1.1 L3.2 U2.1 | length 17.5
  Top Layer w0.3: L3.2@63.838,79.75 L3.2@63.838,80.952
  Top Layer w0.5: L3.2@63.838,79.75 C6.2@63.85,84.97
  Top Layer w0.6: U2.1@57.475,77.925 57.475,79.195 58.03,79.75 L3.2@63.838,79.75 65.363,78.225 D1.1@66.4,78.225
NetC7_1: C7.1 D3.3 | length 3.5
  Top Layer w0.5: D3.3@58.475,83.1 C7.1@61.95,83.1
NetC8_2: C8.2 L4.1 L5.1 U3.1 | length 11.7
  Top Layer w0.3: L5.1@84.325,79.49 L5.1@84.345,79.47
  Top Layer w0.65: U3.1@81.35,73.965 82.515,73.965 83.94,75.39 L5.1@83.94,77.55
  Top Layer w1: L5.1@84.345,79.47 C8.2@88.05,79.47 L4.1@88.05,76.89
NetC9_2: C9.2 U3.5 | length 7.7
  Top Layer w0.25: U3.5@80.4,71.565 80.4,72.32 80.59,72.51 83.03,72.51 83.72,71.82 83.72,70.08 84.16,69.64 C9.2@85.035,69.64
NetC10_2: C10.2 R8.1 R9.2 U2.3 | length 8.7
  Top Layer w0.3: R9.2@51.47,72.24 C10.2@51.47,74.105 52.44,75.075 52.44,76.97 R8.1@53.38,77.91 55.56,77.91 U2.3@55.575,77.925
NetC11_2: C11.2 D2.1 R10.1 | length 9.5
  Top Layer w0.5: C11.2@53.83,88.1 D2.1@55.975,88.1 55.975,89.175 56.66,89.86 R10.1@61.98,89.86
NetC12_2: C12.2 D3.2 R11.1 | length 4
  Top Layer w0.3: C12.2@53.855,82.125 C12.2@53.88,82.15
  Top Layer w0.5: C12.2@53.855,82.125 R11.1@53.855,84.025 ; C12.2@53.88,82.15 D3.2@55.975,82.15
NetC29_2: C29.2 U5.31 | length 3.2
  Top Layer w0.3: 97.83,57.8 97.975,57.655 U5.31@97.975,56.075
  Top Layer w0.6: C29.2@97.023,58.923 97.83,58.115 97.83,57.8
NetC31_1: C31.1 L8.2 U6.1 U6.3 | length 8.3
  Top Layer w0.3: U6.1@130.96,49.89 130,49.89 129.76,50.13 129.76,51.53 130.02,51.79 U6.3@130.96,51.79 ; C31.1@133.37,49.89 C31.1@133.38,49.88
  Top Layer w0.6: U6.1@130.96,49.89 C31.1@133.37,49.89 ; C31.1@133.38,49.88 135.23,49.88 L8.2@135.24,49.89
NetC34_2: C34.2 R32.2 U7.7 U7.8 | length 7.5
  Top Layer w0.3: U7.8@120.91,56.22 U7.8@121.565,56.22 ; U7.7@122.22,55.57 U7.7@121.565,55.57 U7.8@121.565,56.22 ; C34.2@123.89,57.845 123.89,56.69 123.42,56.22 U7.8@121.565,56.22
  Top Layer w0.5: C34.2@123.89,57.845 R32.2@125.765,57.845
NetC41_1: C41.1 CN5.1 R50.2 | length 7
  Top Layer w0.4: C41.1@142.8,97.61 143.77,97.61 ; R50.2@143.96,100.41 143.96,97.61 CN5.1@147.18,97.61
NetC41_2: C41.2 C50.1 R57.2 U11.4 | length 18.3
  Top Layer w0.4: C50.1@132.585,104.62 132.57,104.605 R57.2@132.57,102.8 132.55,102.78 132.55,98.84 132.853,98.537 133.743,98.537 U11.4@133.76,98.52 135.21,98.52 135.66,98.07 135.66,97.04 136.73,95.97 138.17,95.97 139.33,94.81 C41.2@142.8,94.81
NetC43_1: C43.1 R52.2 R53.1 U11.3 | length 6.7
  Top Layer w0.4: U11.3@131.36,98.52 131.36,94.26 R52.2@131.35,94.25 C43.1@133.82,94.25
NetC45_1: C45.1 L10.1 U10.5 | length 15.7
  Top Layer w0.5: v2(58.56,115.26) v2@58.57,115.27 ; C45.1@58.57,117 C45.1@58.58,117.01 ; U10.5@58.59,113.475 v2@58.59,115.17 ; L10.1@67.51,115.03 67.54,115.06 v1(68.96,115.06)
  Top Layer w0.8: v2@58.57,115.27 C45.1@58.57,117
  Bottom Layer w0.6: v2(58.56,115.26) 59.02,115.72 68.28,115.72 v1@68.93,115.07
NetC49_2: C49.2 U10.4 | length 9.7
  Top Layer w0.3: U10.4@59.39,113.475 59.39,114.8 59.59,115 60.59,115 60.87,115.28 60.87,117.51 61.16,117.8 63.985,117.8 C49.2@64.87,116.915
NetC50_2: C50.2 R57.1 R58.1 U11.1 | length 6.7
  Top Layer w0.4: R58.1@129.04,100.425 129.045,100.42 130.203,100.42 ; C50.2@130.68,104.62 130.68,102.815 R57.1@130.665,102.8 130.604,102.739 130.604,102.034 130.203,101.633 130.203,100.42 ; U11.1@131.36,100.42 130.203,100.42
NetC52_1: C52.1 R58.2 | length 2.3
  Top Layer w0.4: C52.1@126.74,98.5 129.02,98.5 R58.2@129.04,98.52
NetD2_2: D2.2 R6.1 | length 6.2
  Top Layer w0.3: D2.2@55.975,86.2 60.69,86.2 61.36,86.87 R6.1@61.945,86.87
NetD4_1: D4.1 L5.2 U3.3 | length 9.5
  Top Layer w0.3: L5.2@79.45,78.94 L5.2@80,79.49
  Top Layer w0.65: U3.3@79.45,73.965 L5.2@79.45,78.94
  Top Layer w1: D4.1@75.625,76.74 L5.2@79.39,76.74
NetLD1_1: LD1.1 R37.1 | length 4.7
  Top Layer w0.3: R37.1@86.69,109.17 LD1.1@91.411,109.17
NetLD2_1: LD2.1 R38.1 | length 4.7
  Top Layer w0.3: R38.1@86.69,110.96 LD2.1@91.401,110.96
NetLD3_1: LD3.1 R39.1 | length 4.7
  Top Layer w0.3: R39.1@86.69,112.76 LD3.1@91.401,112.76
NetQ1_1: Q1.1 R42.2 R44.1 | length 4.2
  Top Layer w0.5: Q1.1@108.63,110.1 112.835,110.1 R42.2@112.84,110.105
NetQ1_3: Q1.3 Q2.3 R46.2 | length 7.4
  Top Layer w0.3: R46.2@106.125,107.896 R46.2@106.13,107.901
  Top Layer w0.5: R46.2@106.13,107.901 Q1.3@106.13,111.05 Q2.3@106.13,115.29
NetQ2_1: Q2.1 R43.1 R45.1 | length 4.2
  Top Layer w0.5: Q2.1@108.63,114.34 112.83,114.34 R43.1@112.84,114.35
NetQ3_1: Q3.1 R47.2 R48.1 | length 4.4
  Top Layer w0.3: Q3.1@41.33,87.7 R48.1@45.68,87.7 ; R48.1@45.69,87.69 R48.1@45.68,87.7 ; R48.1@45.69,87.7 R48.1@45.68,87.7
NetR4_1: R4.1 R5.2 U3.2 | length 7.6
  Top Layer w0.2: U3.2@80.4,73.965 U3.2@80.428,73.937
  Top Layer w0.25: U3.2@80.428,73.937 80.428,73.232 80.62,73.04 83.29,73.04 84.04,72.29 84.92,72.29 85.035,72.405
  Top Layer w0.3: R5.2@85.035,71.465 85.035,72.405 R4.1@85.035,73.25
NetR7_1: R7.1 R8.2 | length 1.9
  Top Layer w0.3: R7.1@51.47,76 51.475,76.005 R8.2@51.475,77.91
NetR12_2: R12.2 R16.2 U4.2 | length 4.4
  Top Layer w0.5: R12.2@41.13,77.91 43.275,77.91 U4.2@43.28,77.905 43.3,77.925 R16.2@43.3,80.13
NetR13_1: R13.1 R14.2 | length 1.9
  Top Layer w0.3: R13.1@42.875,52.925 R14.2@44.8,52.925
NetR16_1: R16.1 R17.1 | length 2.7
  Top Layer w0.5: R17.1@43.3,82.03 43.45,81.88 43.455,81.88 R16.1@45.205,80.13
NetR27_2: R27.2 R28.1 U5.64 | length 8.5
  Top Layer w0.3: U5.64@104.975,44.975 105.815,44.975 106.84,43.95 111.39,43.95 111.825,44.385 R27.2@111.825,45.475
NetR31_2: R31.2 U5.17 | length 7.3
  Top Layer w0.3: U5.17@104.975,56.075 104.975,57.345 105.28,57.65 109.07,57.65 109.7,57.02 R31.2@109.7,56.1
NetR37_2: R37.2 U10.20 | length 32.9
  Top Layer w0.3: U10.20@58.59,105.125 58.59,103.82 60.81,101.6 64.966,101.6 69.31,101.6 71.74,104.03 78.01,104.03 80.16,106.18 80.16,108.43 80.9,109.17 R37.2@84.785,109.17
NetR38_2: R38.2 U10.21 | length 33.2
  Top Layer w0.3: U10.21@59.39,105.125 59.39,103.92 61.16,102.15 65.193,102.15 69.082,102.15 71.562,104.63 77.83,104.63 79.6,106.4 79.6,110.19 80.36,110.95 84.755,110.95 R38.2@84.785,110.92
NetR39_2: R39.2 U10.22 | length 33.5
  Top Layer w0.3: U10.22@60.19,105.125 60.19,103.97 61.46,102.7 65.421,102.7 68.854,102.7 71.344,105.19 77.56,105.19 79.05,106.68 79.05,111.82 79.99,112.76 R39.2@84.785,112.76
NetR51_1: R51.1 U10.31 | length 3.5
  Top Layer w0.3: U10.31@63.165,111.3 65.855,111.3 R51.1@66.425,111.87
NetR54_1: R54.1 U10.28 | length 15.5
  Top Layer w0.3: U10.28@63.165,108.9 64.29,108.9 64.58,108.61 65.57,108.61 66.38,107.8 v1(66.38,105.95) ; R54.1@67.2,98.915 67.205,98.91 v1(68.57,98.91)
  Bottom Layer w0.3: v1(66.38,105.95) 66.38,100.04 67.51,98.91 v1(68.57,98.91)
NetR59_1: R59.1 R60.1 U10.26 | length 35.2
  Top Layer w0.3: U10.26@63.165,107.3 v1(64.9,107.3) ; v1(85.62,99.79) 85.64,99.81 R59.1@88.95,99.81 ; v1(64.9,107.3) 64.9,107.52 65.12,107.3 v1(64.9,107.3)
  Bottom Layer w0.3: v1(64.9,107.3) 64.9,106.21 65.81,105.3 65.81,99.76 67.75,97.82 80.91,97.82 82.88,99.79 v1(85.62,99.79)
POWER_ON: R43.2 U10.19 | length 71.9
  Top Layer w0.3: v1(57.77,107.14) 57.79,107.12 U10.19@57.79,105.125 ; R43.2@112.84,116.255 113.625,116.255 v1(114.44,115.44)
  Bottom Layer w0.3: v1(57.77,107.14) 55.9,109.01 55.9,114.57 57.78,116.45 113.43,116.45 v1(114.44,115.44)
RESET_BTN: CN4.7 XT1.10 | length 78.5
  Top Layer w0.3: CN4.7@43.2,97.95 45.58,97.95 70.84,97.95 74.61,101.72 109.498,101.72 109.808,101.41 114.21,101.41 115.67,99.95 XT1.10@115.67,96.23
SELB: CN1.25 R23.2 R26.1 | length 9.7
  Top Layer w0.3: R23.2@62.1,64.73 62.85,64.73 63.54,64.04 66.5,64.04 67.525,63.015 CN1.25@67.525,59.5
STBY3V3: CN3.3 CN4.3 L11.2 LD1.2 LD2.2 LD3.2 P1.1 Q1.2 Q2.2 R40.2 R44.2 R45.2 XT1.4 | length 247.5
  Top Layer w0.3: v2(41.38,100.01) 41.44,99.95 CN4.3@43.2,99.95 ; LD1.2@93.081,109.18 LD1.2@93.091,109.17 ; XT1.4@118.67,96.23 118.67,99.97 118.91,100.21 118.91,100.41 118.97,100.47 ; v1(162.7,60.4) 163.84,60.4 164.06,60.62 164.6,60.62 165.04,61.06 CN3.3@166.26,61.06
  Top Layer w0.5: v1(64.13,95.96) 64.13,96.63 64.515,97.015 R40.2@65.41,97.015 ; v2@74.16,114.53 v2(74.18,114.55) ; v2(74.63,95.95) 74.64,95.95 75.08,96.39 ; LD1.2@93.081,109.18 LD2.2@93.081,110.96 LD3.2@93.081,112.76 v1(93.081,115.59) ; R44.2@110.98,112.01 110.97,112 Q1.2@108.63,112 107.693,112 107.4,112.293 107.4,115.95 107.68,116.23 108.62,116.23 Q2.2@108.63,116.24 110.965,116.24 R45.2@110.98,116.255
  Top Layer w0.7: L11.2@72.705,114.53 v2@74.16,114.53
  Top Layer w0.8: v2(74.18,114.55) 76.22,112.51 P1.1@76.22,108.03 ; v2(74.63,95.95) 76.22,97.54 76.19,97.57 76.2,97.58 v2(76.2,99.53) ; v2(115.87,113.2) 118.97,110.1 118.97,100.47
  Bottom Layer w0.3: v2(115.87,113.2) 116.87,113.2 120.17,116.5 158.2,116.5 159.45,115.25 159.45,95.13 163.01,91.57 163.01,69.72 163.02,69.71 163.02,62.95 162.7,62.63 v1(162.7,60.4)
  Bottom Layer w0.8: v2(41.38,100.01) 45.84,100.01 46.4,99.45 46.4,96.68 47.13,95.95 64.13,95.95 v2(74.63,95.95) ; v2(74.18,114.55) 75.22,115.59 v1(93.081,115.59) 98.64,115.59 101.02,113.21 v1(107.35,113.21) v2@115.87,113.21 ; v2(76.2,99.53) 76.2,107.99 76.19,108 P1.1@76.22,108.03
SWCLK: P1.3 U10.24 | length 13.1
  Top Layer w0.3: U10.24@61.79,105.125 61.79,104.04 62.03,103.8 65.877,103.8 68.37,103.8 71.14,106.57 P1.3@71.14,108.03
SWDIO: P1.2 U10.23 | length 16.7
  Top Layer w0.3: U10.23@60.99,105.125 60.99,104.02 61.76,103.25 65.649,103.25 68.62,103.25 71.79,106.42 73.17,106.42 73.68,106.93 P1.2@73.68,108.03
TP_IRQ: C39.1 CN2.4 R36.2 U9.2 | length 10.7
  Top Layer w0.3: C39.1@144.37,62.72 R36.2@146.765,62.72 146.765,61.995 147.08,61.68 148.6,61.68 149.425,60.855 CN2.4@149.425,58.475 ; 145.58,62.73 U9.2@145.58,64.82
TP_IRQ_33: U9.4 XT1.13 | length 53.1
  Top Layer w0.3: XT1.13@114.17,96.23 114.17,92.56 115.43,91.3 117.11,91.3 117.9,90.51 117.9,81.37 v1(128.26,71.01) ; v1(145.35,70.52) 145.36,70.52 146.53,69.35 U9.4@146.53,67.22
  Bottom Layer w0.3: v1(128.26,71.01) 144.86,71.01 v1(145.35,70.52)
TP_RST: CN2.1 U8.4 | length 10.4
  Top Layer w0.3: CN2.1@150.925,58.475 150.925,59.285 151.36,59.72 151.36,60.38 152.38,61.4 155.83,61.4 156.44,62.01 U8.4@156.44,64.59
TP_RST#_33: R35.2 U8.2 XT1.12 | length 64.2
  Top Layer w0.3: XT1.12@114.67,96.23 114.67,92.99 115.83,91.83 117.33,91.83 118.43,90.73 118.43,81.63 128.22,71.84 v1(129.01,71.84) ; v1(155.64,71.18) 156.26,70.56 R35.2@157.405,70.56 157.39,70.545 U8.2@157.39,66.99
  Bottom Layer w0.3: v1(129.01,71.84) 129.23,71.62 155.2,71.62 v1(155.64,71.18)
TP_VDD: C36.1 C38.1 CN2.2 L9.1 | length 10
  Top Layer w0.3: CN2.2@150.425,58.475 150.425,59.835 150.6,60.01
  Top Layer w0.6: L9.1@150.13,64.21 C38.1@151.99,64.21 ; 150.6,60.01 150.6,60.84 151.99,62.23 C38.1@151.99,64.21 ; C36.1@153.79,64.21 C38.1@151.99,64.21
U/D: CN1.6 R21.2 R24.1 | length 19.2
  Top Layer w0.3: R24.1@45.792,50.097 45.792,50.802 46.71,51.72 54.82,51.72 56.66,53.56 56.66,56.75 58.025,58.115 CN1.6@58.025,59.5
WHEEL_KEY1: C47.2 R55.1 U10.14 XT1.6 | length 101.2
  Top Layer w0.3: U10.14@54.815,108.1 52.87,108.1 51.52,106.75 51.52,101.58 52.6,100.5 64.51,100.5 69.77,100.5 72.17,102.9 108.31,102.9 109.57,104.16 111.83,104.16 112.12,104.45 113.34,104.45 ; 113.36,104.45 114.12,103.69 115.15,103.69 117.67,101.17 XT1.6@117.67,96.23 117.67,94.5 119.87,92.3 119.87,90.49 123.97,86.39 126.505,86.39 R55.1@127.115,85.78 C47.2@127.115,84
WHEEL_KEY2: C48.2 R56.1 U10.15 XT1.5 | length 99.3
  Top Layer w0.3: U10.15@54.815,107.3 52.91,107.3 52.09,106.48 52.09,101.81 52.85,101.05 64.738,101.05 69.537,101.05 71.968,103.48 108.06,103.48 109.29,104.71 111.6,104.71 111.89,105 113.64,105 114.37,104.27 115.4,104.27 118.17,101.5 XT1.5@118.17,96.23 118.17,94.8 120.42,92.55 120.42,90.73 124.21,86.94 126.46,86.94 R56.1@127.11,87.59 C48.2@127.11,89.42
pads on no net: CN1.4 CN1.30 CN1.31 CN1.34 CN1.37 CN1.38 U1.4 U5.1 U5.4 U5.5 U5.6 U5.7 U5.8 U5.9 U5.10 U5.11 U5.12 U5.13 U5.34 U5.50 U5.51 U5.53 U5.54 U5.56 U5.57 U5.59 U5.60 U5.61 U5.62 U6.4 U8.1 U9.1 U10.2 U10.3 U10.10 U10.25 U10.27

## Polygon pours and split planes (outlines as drawn)
GND on Top Layer "GND_L01_P004" (solid, remove dead copper, pour order 4): 29.45,122.05 29.45,37.44 39.06,37.44 39.06,42.43 163.75,42.43 163.75,37.45 173.35,37.45 173.35,122.05
AGND on Top Layer "AGND_L01_P000" (solid, remove dead copper, pour order 0): 126.4,106.6 119.02,99.22 119.02,95.14 119.38,94.78 124.46,94.78 127.18,92.06 151.27,92.06 152.58,93.37 152.58,103.89 150.99,105.48 137.91,105.48 136.79,106.6
AGND on Bottom Layer "AGND_L02_P002" (solid, remove dead copper, pour order 2): 126.4,106.6 119.02,99.22 119.02,95.14 119.38,94.78 124.46,94.78 127.18,92.06 151.27,92.06 152.58,93.37 152.58,103.89 150.99,105.48 137.91,105.48 136.79,106.6
GND on Bottom Layer "GND_L02_P006" (solid, pour order 6): 29.45,122.05 29.45,37.44 39.06,37.44 39.06,42.43 163.75,42.43 163.75,37.45 173.35,37.45 173.35,122.05

## Other copper
Top Layer:
  region net GND: 103.578,97.134 104.77,97.13 104.77,95.24 103.57,95.24

## Silkscreen, mask and mechanical layers (free items; w line width, h text height)
Top Overlay:
  lines w0.3: 53.625,42.595 53.625,53.625 53.625,54.1 ; 65.85,76.22 65.85,76.44 ; 67.15,76.17 67.15,76.41 ; 76.9,42.59 76.9,54.2 ; 119.65,99.61 119.65,110.74 ; 119.69,110.74 156.09,110.74 156.09,90.85 125.59,90.85 ; 146.55,42.58 146.55,53.575 ; 152.8,42.58 152.8,53.675 ; 154.18,101.7 154.18,95.51 145.28,95.51 145.28,101.71 154.18,101.71
  text "PCB-1.0 DISPLAY 08.2020 O.G." at 131.12,117.74 h1.5
  text "SWD" at 70.36,110.25 h1.5
  text "RIGHT" at 37.82,104.85 h1.5
  text "DIO" at 74.23,103.68 h1 r90
  text "3V3" at 76.75,103.66 h1 r90
  text "CLK" at 71.62,103.62 h1 r90
  text "GND" at 69.12,103.59 h1 r90
  text "MIC" at 153.48,96.98 h1.3 r90
  text "MAIN BOARD" at 102.76,86.39 h1.5
  text "LEFT" at 166.27,68.15 h1.5
  text "HSD080IFW1-A00" at 55.266,50.776 h1.5
  text "GT911" at 150.65,44.02 h1.5 r90
Mechanical 1:
  lines w0.254: 163.547,42.247 157.947,42.247 39.253,42.247 39.253,37.247 29.253,37.247 29.253,42.253 29.253,122.25 168.513,122.25 173.553,122.25 173.553,42.253 173.553,37.253 163.553,37.253 163.553,42.253